# Altium PCB distribution amp (seeed).pcbdoc
Units mil, origin at the board's own origin, x right, y up, seen from the top; angles counter-clockwise.
Board outline 3937.01 x 3937.01 mil, 2 copper layers (Top Layer, Bottom Layer); 136 components, 129 nets, 598 pads, 101 vias.
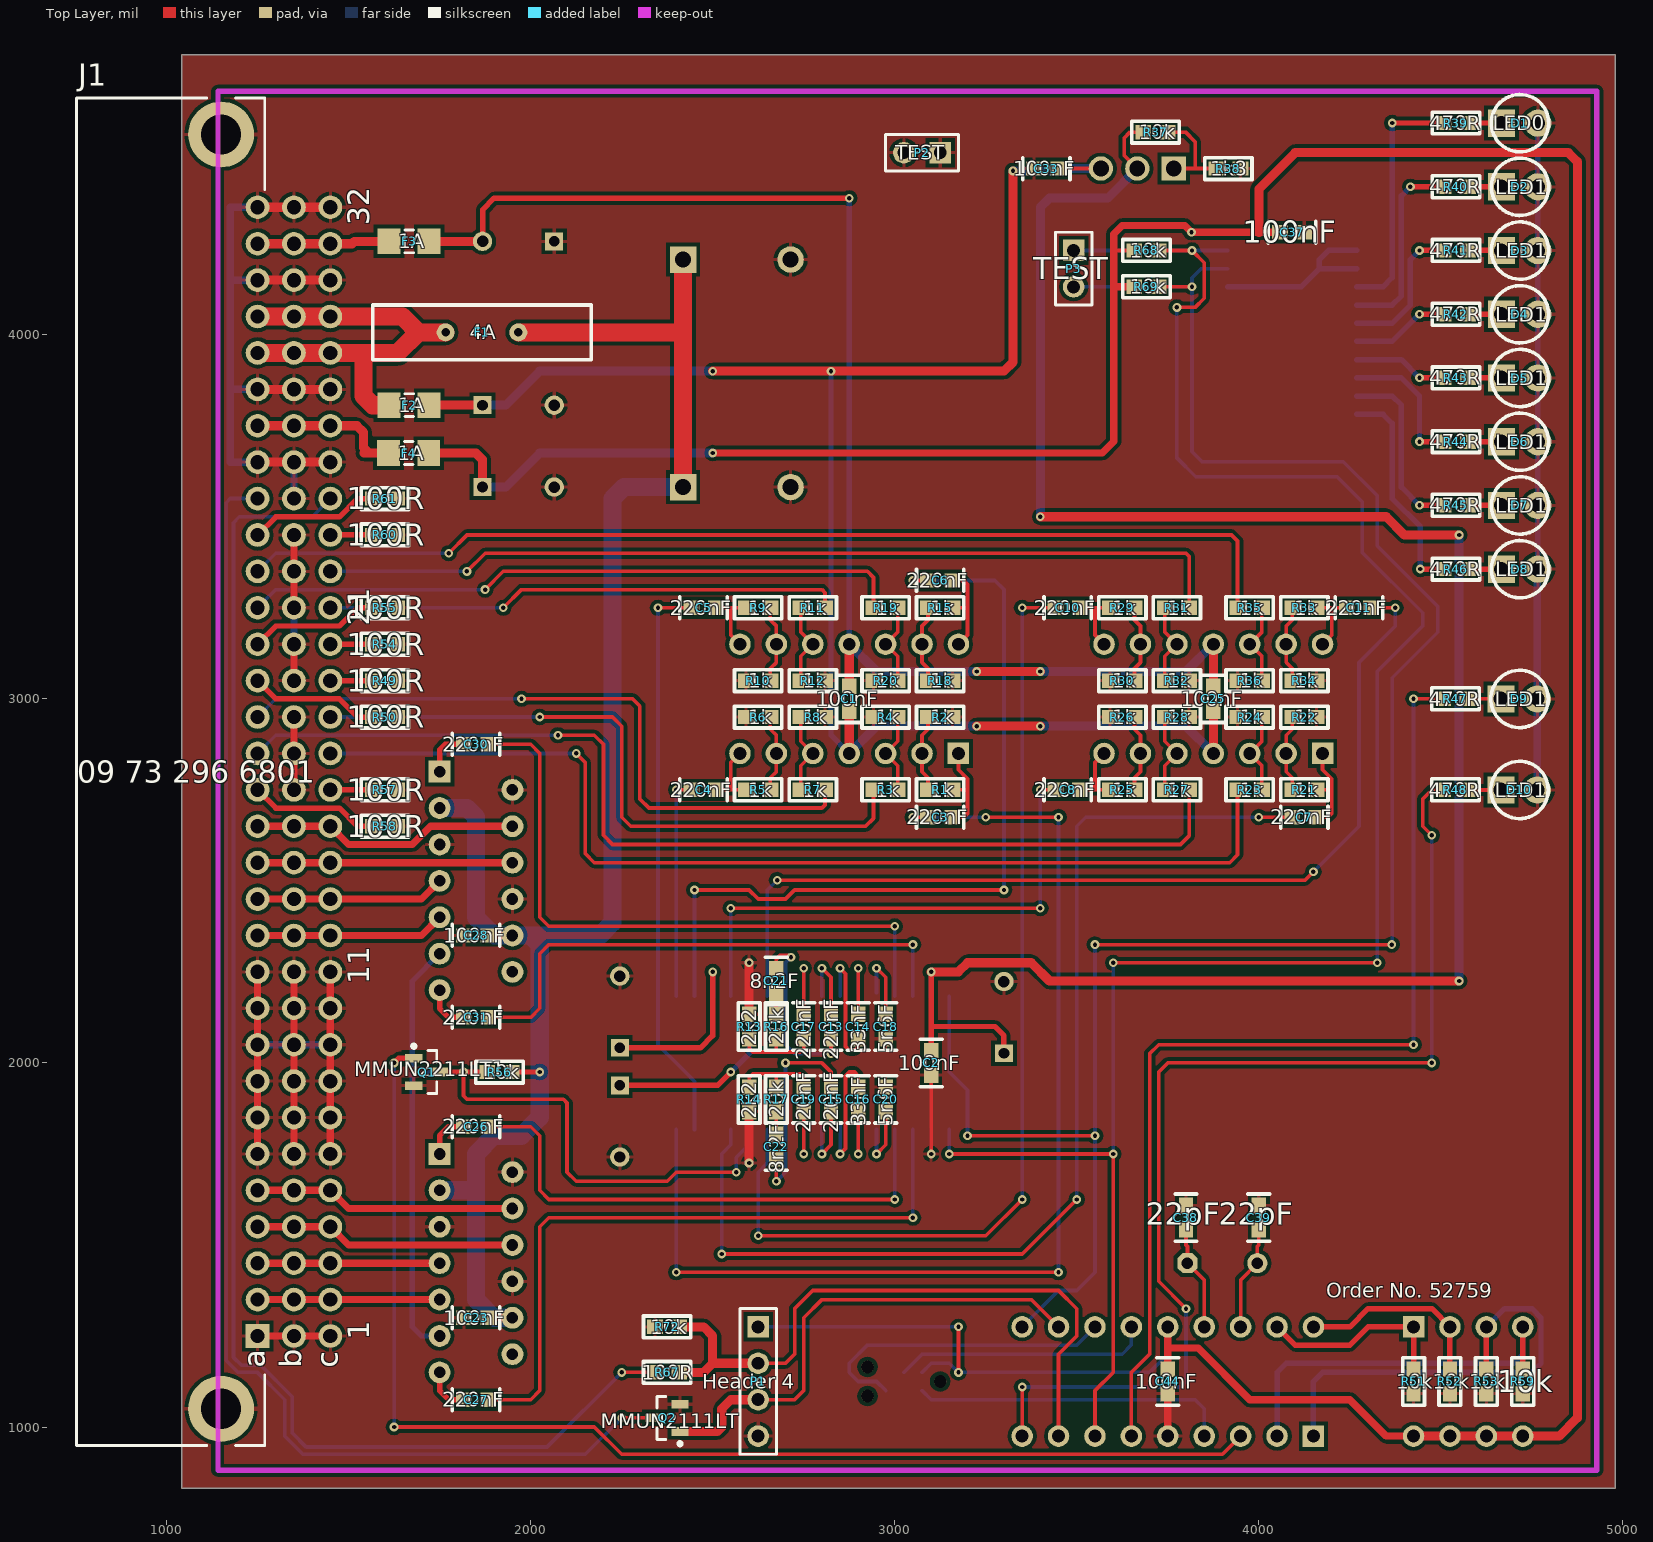
[diagram p0: Top Layer view]
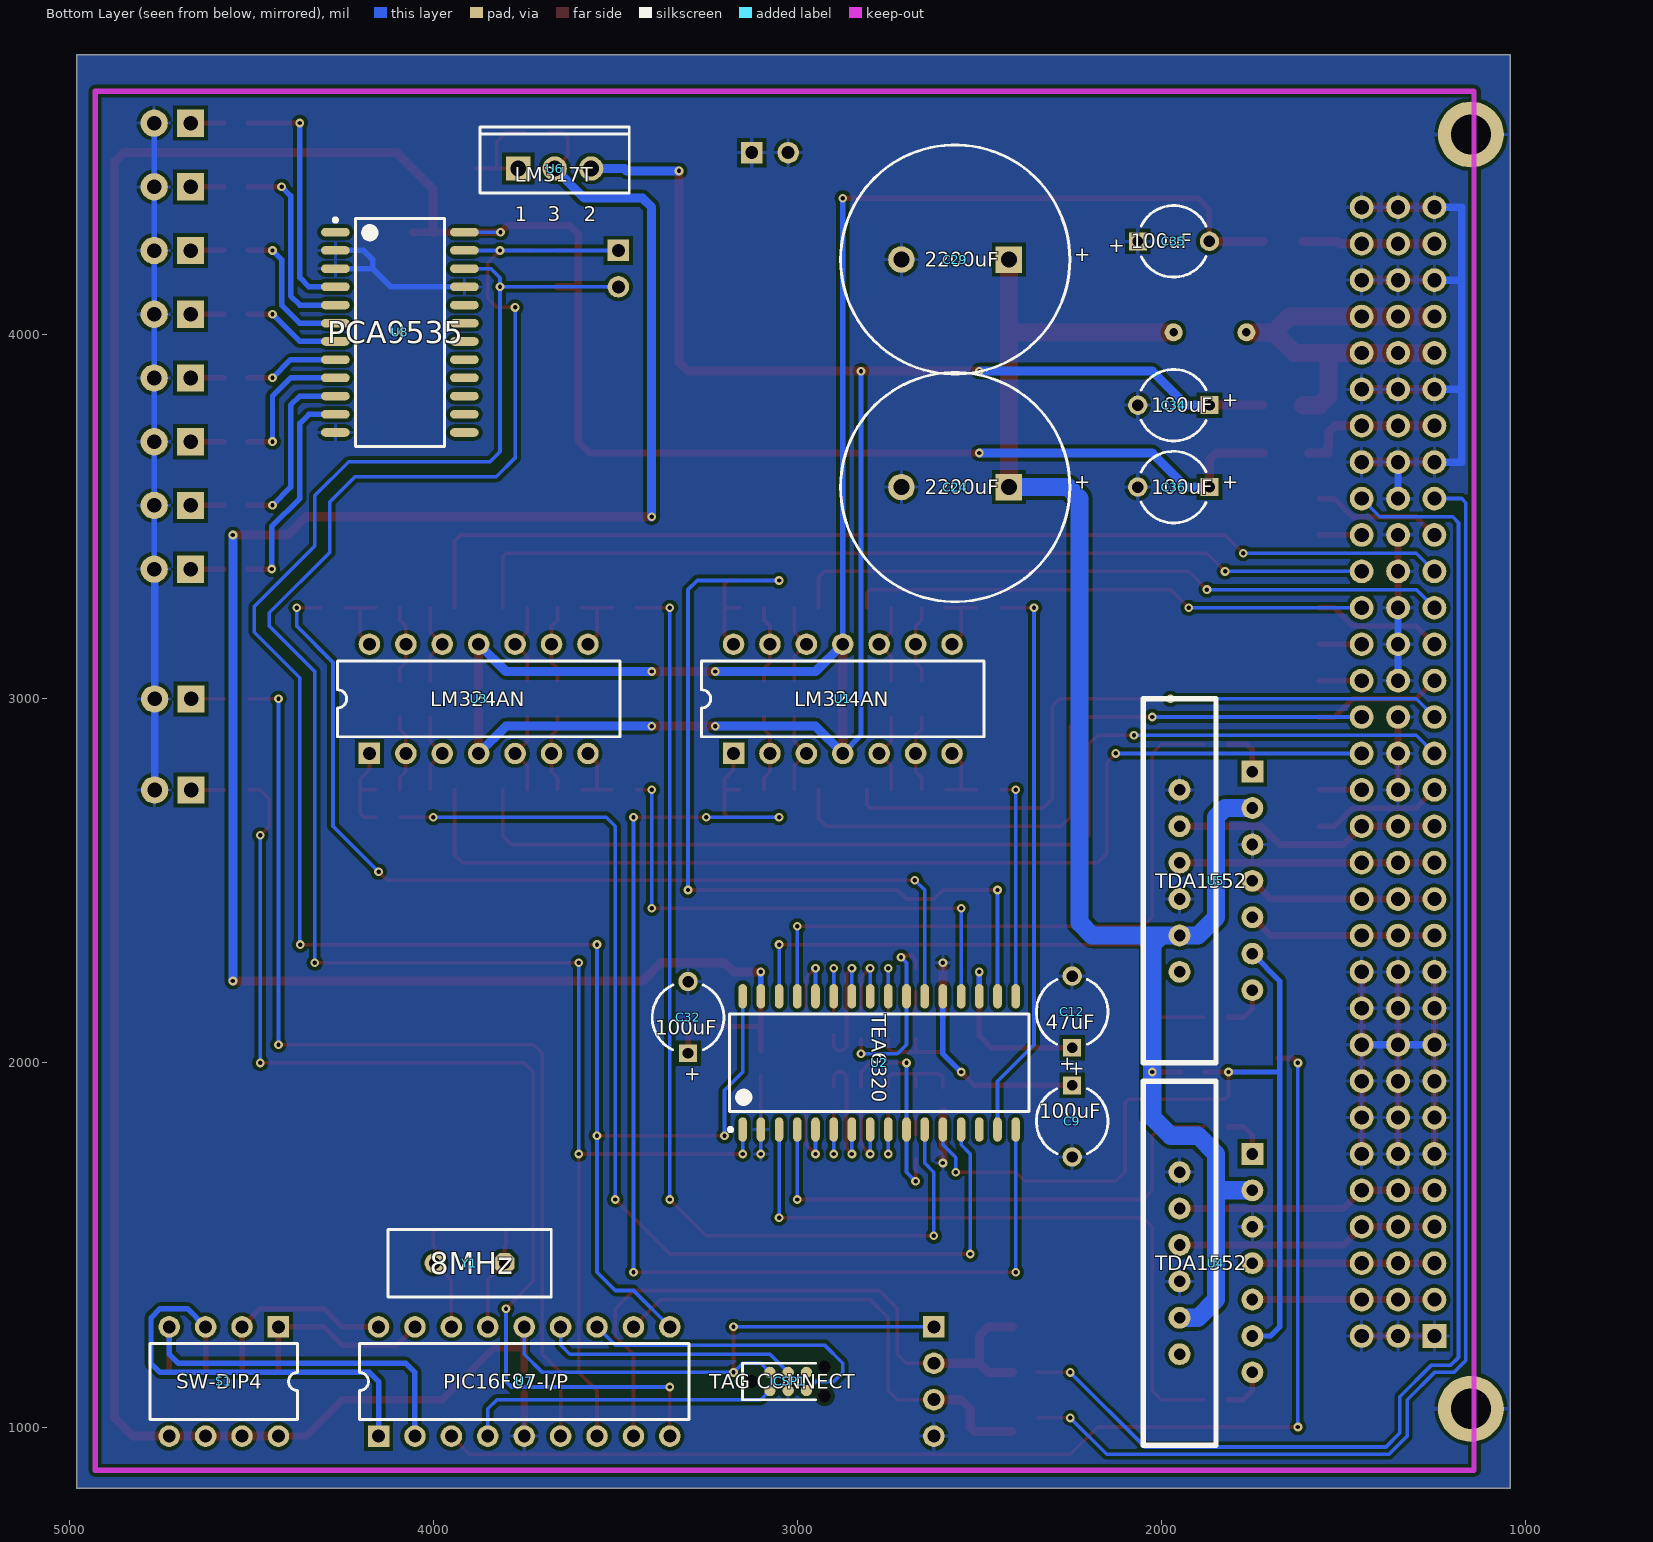
[diagram p1: Bottom Layer view, seen from below]

## Layer stack, top to bottom
Top Layer: signal copper 1.4
Dielectric: dielectric 12.6, FR-4, Dk 4.8
Bottom Layer: signal copper 1.4

## Board outline
1041.34,831.5 1041.34,4768.5 4978.35,4768.5 4978.35,831.5

## Design rules (kind name [scope] priority, off if disabled: settings)
Clearance [All] p1: gap=10
FabricationTestPointUsage TestPointUsage [All] p1: valid=0 allowmultiple=FALSE
FabricationTestpoint Testpoint [All] p1: side=3 testpointundercomponent=TRUE minsize=40 maxsize=100 preferedsize=60 minholesize=0 maxholesize=40 preferedholesize=32 testpointgrid=1 allowsidetop=TRUE allowsidebottom=TRUE usegrid=TRUE gridtolerance=0.01
PolygonConnect [All] p1: connectstyle=Relief reliefconductorwidth=10 reliefentries=4 polygonreliefangle="90 Angle"
RoutingVias [All] p1: holewidth=12 width=24 viastyle="Through Hole" minholewidth=12 minwidth=24 maxholewidth=28 maxwidth=50
SilkscreenOverComponentPads [All] p1: minsilkscreentomaskgap=10
SolderMaskExpansion [All] p1: expansion=4
Width "Schematic Width Constraint_9" [InNet('LEFT_1-')] p1: maxlimit=250 minlimit=15 preferedwidth=25 bottomlayer_minwidth=25 minimp=50.000000 maximp=50.000000 favimp=50.000000
Width "Schematic Width Constraint_8" [InNet('RIGHT_1-')] p2: maxlimit=250 minlimit=15 preferedwidth=25 bottomlayer_minwidth=25 minimp=50.000000 maximp=50.000000 favimp=50.000000
Width "Schematic Width Constraint_7" [InNet('RIGHT_1+')] p3: maxlimit=250 minlimit=15 preferedwidth=25 bottomlayer_minwidth=25 minimp=50.000000 maximp=50.000000 favimp=50.000000
Width "Schematic Width Constraint_6" [InNet('RIGHT_2+')] p4: maxlimit=250 minlimit=15 preferedwidth=25 bottomlayer_minwidth=25 minimp=50.000000 maximp=50.000000 favimp=50.000000
Width "Schematic Width Constraint_5" [InNet('RIGHT_2-')] p5: maxlimit=250 minlimit=15 preferedwidth=25 bottomlayer_minwidth=25 minimp=50.000000 maximp=50.000000 favimp=50.000000
Width "Schematic Width Constraint_4" [InNet('LEFT_2-')] p6: maxlimit=250 minlimit=15 preferedwidth=25 bottomlayer_minwidth=25 minimp=50.000000 maximp=50.000000 favimp=50.000000
Width "Schematic Width Constraint_3" [InNet('LEFT_2+')] p7: maxlimit=250 minlimit=15 preferedwidth=25 bottomlayer_minwidth=25 minimp=50.000000 maximp=50.000000 favimp=50.000000
Width "Schematic Width Constraint_2" [InNet('LEFT_1+')] p8: maxlimit=250 minlimit=15 preferedwidth=25 bottomlayer_minwidth=25 minimp=50.000000 maximp=50.000000 favimp=50.000000
Width "Schematic Width Constraint" [InNet('+12VHP')] p9: maxlimit=250 minlimit=15 preferedwidth=50 minimp=50.000000 maximp=50.000000 favimp=50.000000
Width "Schematic Width Constraint_1" [InNet('+12V IN')] p10: maxlimit=250 minlimit=50 preferedwidth=50
Width [All] p11: maxlimit=100 minlimit=10 preferedwidth=15
25 further rules are at their usual default settings.

## Classes and differential pairs
component class U_DIGITAL: C37 C38 C39 C44 D1 D2 D3 D4 D5 D6 D7 D8 D9 D10 ICSP1 P1 P2 P3 Q1 Q2 R39 R40 R41 R42 R43 R44 R45 R46 R47 R48 R51 R52 R53 R56 R59 R67 R68 R69 R72 S1 U7 U8 Y1
component class "U_DC POWER": C32 C33 C34 C35 C36 F1 F2 F3 F4 R37 R38 U6
component class U_AUDIO: C1 C2 C3 C4 C5 C6 C7 C8 C9 C10 C11 C12 C13 C14 C15 C16 C17 C18 C19 C20 C21 C22 C23 C24 C25 C26 C27 C28 C29 C30 C31 R1 R2 R3 R4 R5 R6 R7 R8 R9 R10 R11 R12 R13 R14 R15 R16 R17 R18 R19 R20 R21 R22 R23 R24 R25 R26 R27 R28 R29 R30 R31 R32 R33 R34 R35 R36 R49 R50 R54 R55 R57 R58 R60 R61 U1 U2 U3 U4 U5
component class "Distribution Amp": J1

## Components (designator, comment, footprint, x,y, rotation, side; value= is the part's Value field where it differs from the comment)
C1 "100nF" "CAP (3D) - 0603" 2875,3000 r270 top
C2 "100nF" "CAP (3D) - 0603" 3100,2000 r90 top
C3 "220nF" "CAP (3D) - 0603" 3125,2675 r0 top
C4 "220nF" "CAP (3D) - 0603" 2475,2750 r0 top
C5 "220nF" "CAP (3D) - 0603" 2475,3250 r0 top
C6 "220nF" "CAP (3D) - 0603" 3125,3325 r0 top
C7 "220nF" "CAP (3D) - 0603" 4125,2675 r0 top
C8 "220nF" "CAP (3D) - 0603" 3475,2750 r0 top
C9 "100uF" CAPPR5-5x5 2245,1840 r270 bottom
C10 "220nF" "CAP (3D) - 0603" 3475,3250 r0 top
C11 "220nF" "CAP (3D) - 0603" 4275,3250 r180 top
C12 "47uF" CAPPR5-5x5 2245,2140 r90 bottom
C13 "220nF" "CAP (3D) - 0603" 2825,2100 r270 top
C14 "33nF" "CAP (3D) - 0603" 2900,2100 r270 top
C15 "220nF" "CAP (3D) - 0603" 2825,1900 r90 top
C16 "33nF" "CAP (3D) - 0603" 2900,1900 r90 top
C17 "220nF" "CAP (3D) - 0603" 2750,2100 r90 top
C18 "5n6F" "CAP (3D) - 0603" 2975,2100 r90 top
C19 "220nF" "CAP (3D) - 0603" 2750,1900 r270 top
C20 "5n6F" "CAP (3D) - 0603" 2975,1900 r270 top
C21 "8n2F" "CAP (3D) - 0603" 2675,2225 r90 top
C22 "8n2F" "CAP (3D) - 0603" 2675,1770 r270 top
C23 "100nF" "CAP (3D) - 0603" 1850,1300 r180 top
C24 "2200uF" CAPPR7.5-16x35 2566.34,3581.5 r0 bottom
C25 "100nF" "CAP (3D) - 0603" 3875,3000 r270 top
C26 "220nF" "CAP (3D) - 0603" 1850,1825 r0 top
C27 "220nF" "CAP (3D) - 0603" 1850,1075 r0 top
C28 "100nF" "CAP (3D) - 0603" 1850,2350 r180 top
C29 "2200uF" CAPPR7.5-16x35 2566.34,4206.5 r0 bottom
C30 "220nF" "CAP (3D) - 0603" 1850,2875 r0 top
C31 "220nF" "CAP (3D) - 0603" 1850,2125 r0 top
C32 "100uF" CAPPR5-5x5 3300,2125 r90 bottom
C33 "100nF" "CAP (3D) - 0603" 3416.34,4456.5 r180 top
C34 "100uF" CAPPR5-5x5 1966.34,3806.5 r0 bottom
C35 "100uF" CAPPR5-5x5 1966.34,4256.5 r180 bottom
C36 "100uF" CAPPR5-5x5 1966.34,3581.5 r0 bottom
C37 "100nF" "CAP (3D) - 0603" 4091.34,4281.5 r0 top
C38 "22pF" "CAP (3D) - 0603" 3800,1575 r90 top
C39 "22pF" "CAP (3D) - 0603" 4000,1575 r90 top
C44 "100nF" "CAP (3D) - 0603" 3750,1125 r270 top
D1 "LED0" "LED 3MM" 4666.34,4581.5 r0 top
D2 "LED1" "LED 3MM" 4666.34,4406.5 r0 top
D3 "LED1" "LED 3MM" 4666.34,4231.5 r0 top
D4 "LED1" "LED 3MM" 4666.34,4056.5 r0 top
D5 "LED1" "LED 3MM" 4666.34,3881.5 r0 top
D6 "LED1" "LED 3MM" 4666.34,3706.5 r0 top
D7 "LED1" "LED 3MM" 4666.34,3531.5 r0 top
D8 "LED1" "LED 3MM" 4666.34,3356.5 r0 top
D9 "LED1" "LED 3MM" 4665,3000 r0 top
D10 "LED1" "LED 3MM" 4665,2750 r0 top
F1 "4A" POLYSWITCH 1866.34,4006.5 r0 top
F2 "1A" 3216[1206] 1666.34,3806.5 r0 top
F3 "1A" 3216[1206] 1666.34,4256.5 r0 top
F4 "1A" 3216[1206] 1665,3675 r0 top
ICSP1 "TAG CONNECT" "ICSP - TAG CONNECT TYPE2" 3125,1125 r180 bottom
J1 "09 73 296 6801" 0973296X801 752.36,2800 r90 top
P1 "Header 4" HDR1X4 2625,1275 r270 top
P2 "TEST" HDR1X2 3125,4500 r180 top
P3 "TEST" HDR1X2 3491.34,4231.5 r270 top
Q1 "MMUN2211LT1" SOT23-3L 1714.57,1975 r0 top
Q2 "MMUN2111LT" SOT23-3L 2375,1025 r180 top
R1 "1k" "RES (3D) - 0603" 3125,2750 r180 top
R2 "1k" "RES (3D) - 0603" 3125,2950 r0 top
R3 "1k" "RES (3D) - 0603" 2975,2750 r180 top
R4 "1k" "RES (3D) - 0603" 2975,2950 r180 top
R5 "1k" "RES (3D) - 0603" 2625,2750 r0 top
R6 "1k" "RES (3D) - 0603" 2625,2950 r180 top
R7 "1k" "RES (3D) - 0603" 2775,2750 r0 top
R8 "1k" "RES (3D) - 0603" 2775,2950 r0 top
R9 "1k" "RES (3D) - 0603" 2625,3250 r0 top
R10 "1k" "RES (3D) - 0603" 2625,3050 r180 top
R11 "1k" "RES (3D) - 0603" 2775,3250 r0 top
R12 "1k" "RES (3D) - 0603" 2775,3050 r0 top
R13 "2k2" "RES (3D) - 0603" 2600,2100 r270 top
R14 "2k2" "RES (3D) - 0603" 2600,1900 r90 top
R15 "1k" "RES (3D) - 0603" 3125,3250 r180 top
R16 "20k" "RES (3D) - 0603" 2675,2100 r270 top
R17 "20k" "RES (3D) - 0603" 2675,1900 r90 top
R18 "1k" "RES (3D) - 0603" 3125,3050 r0 top
R19 "1k" "RES (3D) - 0603" 2975,3250 r180 top
R20 "1k" "RES (3D) - 0603" 2975,3050 r180 top
R21 "1k" "RES (3D) - 0603" 4125,2750 r180 top
R22 "1k" "RES (3D) - 0603" 4125,2950 r0 top
R23 "1k" "RES (3D) - 0603" 3975,2750 r180 top
R24 "1k" "RES (3D) - 0603" 3975,2950 r180 top
R25 "1k" "RES (3D) - 0603" 3625,2750 r0 top
R26 "1k" "RES (3D) - 0603" 3625,2950 r180 top
R27 "1k" "RES (3D) - 0603" 3775,2750 r0 top
R28 "1k" "RES (3D) - 0603" 3775,2950 r0 top
R29 "1k" "RES (3D) - 0603" 3625,3250 r0 top
R30 "1k" "RES (3D) - 0603" 3625,3050 r180 top
R31 "1k" "RES (3D) - 0603" 3775,3250 r0 top
R32 "1k" "RES (3D) - 0603" 3775,3050 r0 top
R33 "1k" "RES (3D) - 0603" 4125,3250 r180 top
R34 "1k" "RES (3D) - 0603" 4125,3050 r0 top
R35 "1k" "RES (3D) - 0603" 3975,3250 r180 top
R36 "1k" "RES (3D) - 0603" 3975,3050 r180 top
R37 "10k" "RES (3D) - 0603" 3716.34,4556.5 r0 top
R38 "1k8" "RES (3D) - 0603" 3916.34,4456.5 r0 top
R39 "470R" "RES (3D) - 0603" 4541.34,4581.5 r180 top
R40 "470R" "RES (3D) - 0603" 4541.34,4406.5 r180 top
R41 "470R" "RES (3D) - 0603" 4541.34,4231.5 r180 top
R42 "470R" "RES (3D) - 0603" 4541.34,4056.5 r180 top
R43 "470R" "RES (3D) - 0603" 4541.34,3881.5 r180 top
R44 "470R" "RES (3D) - 0603" 4541.34,3706.5 r180 top
R45 "470R" "RES (3D) - 0603" 4541.34,3531.5 r180 top
R46 "470R" "RES (3D) - 0603" 4541.34,3356.5 r180 top
R47 "470R" "RES (3D) - 0603" 4540,3000 r180 top
R48 "470R" "RES (3D) - 0603" 4540,2750 r180 top
R49 "100R" "RES (3D) - 0603" 1600,3050 r180 top
R50 "100R" "RES (3D) - 0603" 1600,2950 r180 top
R51 "10k" "RES (3D) - 0603" 4425,1125 r270 top
R52 "10k" "RES (3D) - 0603" 4525,1125 r270 top
R53 "10k" "RES (3D) - 0603" 4625,1125 r270 top
R54 "100R" "RES (3D) - 0603" 1600,3150 r180 top
R55 "100R" "RES (3D) - 0603" 1600,3250 r180 top
R56 "10k" "RES (3D) - 0603" 1914.57,1975 r0 top
R57 "100R" "RES (3D) - 0603" 1600,2750 r180 top
R58 "100R" "RES (3D) - 0603" 1600,2650 r180 top
R59 "10k" "RES (3D) - 0603" 4725,1125 r270 top
R60 "100R" "RES (3D) - 0603" 1600,3450 r180 top
R61 "100R" "RES (3D) - 0603" 1600,3550 r180 top
R67 "100R" "RES (3D) - 0603" 2375,1150 r0 top
R68 "10k" "RES (3D) - 0603" 3691.34,4231.5 r180 top
R69 "10k" "RES (3D) - 0603" 3691.34,4131.5 r180 top
R72 "10k" "RES (3D) - 0603" 2375,1275 r180 top
S1 "SW-DIP4" DIP-8 4575,1125 r0 bottom
U1 "LM324AN" N014 2875,3000 r180 bottom
U2 "TEA6320" SOIC127P1047-32L 2775,2000 r90 bottom
U3 "LM324AN" N014 3875,3000 r180 bottom
U4 "TDA1552" DBS13P 1750,1750 r270 bottom
U5 "TDA1552" DBS13P 1750,2800 r270 bottom
U6 "LM317T" TO220ABN 3666.34,4456.5 r180 bottom
U7 "PIC16F87-I/P" PDIP300-18 3750,1125 r180 bottom
U8 "PCA9535" WSO24_L 4091.34,4006.5 r180 bottom
Y1 "8MHz" HC-49U 3900,1450 r0 bottom

## Footprints (in the part's own frame and the unit in brackets; to place one, negate y for a bottom-side part, rotate by r counter-clockwise, add the part's x,y. Pads: shape width x height; smd on the part's side, far side on the other; paste and mask are expansions set on the pad)
3216[1206] [mm] "Chip Resistor; Body 3.2 x 1.6 mm (LxW typ)"
  rect 1.6x1.8 smd: 1(-1.4,0) 2(1.4,0)
  silkscreen extent -0.3,-0.8 0.3,0.8
0973296X801 [mm] "Connector; DIN 41612, Type R, Thru-Hole; Rows a+b+c, 96 Position; Right Angle"
  round 4.6 hole 2.8: 33(-44.45,-10.1) 34(44.45,-10.1)
  rect 1.65x1.65 hole 1: A1(-39.37,-12.64)
  round 1.65 hole 1: A2(-36.83,-12.64) A3(-34.29,-12.64) A4(-31.75,-12.64) A5(-29.21,-12.64) A6(-26.67,-12.64) A7(-24.13,-12.64) A8(-21.59,-12.64) A9(-19.05,-12.64) A10(-16.51,-12.64) A11(-13.97,-12.64) A12(-11.43,-12.64) A13(-8.89,-12.64) A14(-6.35,-12.64) A15(-3.81,-12.64) A16(-1.27,-12.64) A17(1.27,-12.64) A18(3.81,-12.64) A19(6.35,-12.64) A20(8.89,-12.64) A21(11.43,-12.64) A22(13.97,-12.64) A23(16.51,-12.64) A24(19.05,-12.64) A25(21.59,-12.64) A26(24.13,-12.64) A27(26.67,-12.64) A28(29.21,-12.64) A29(31.75,-12.64) A30(34.29,-12.64) A31(36.83,-12.64) A32(39.37,-12.64) B1(-39.37,-15.18) B2(-36.83,-15.18) B3(-34.29,-15.18) B4(-31.75,-15.18) B5(-29.21,-15.18) B6(-26.67,-15.18) B7(-24.13,-15.18) B8(-21.59,-15.18) B9(-19.05,-15.18) B10(-16.51,-15.18) B11(-13.97,-15.18) B12(-11.43,-15.18) B13(-8.89,-15.18) B14(-6.35,-15.18) B15(-3.81,-15.18) B16(-1.27,-15.18) B17(1.27,-15.18) B18(3.81,-15.18) B19(6.35,-15.18) B20(8.89,-15.18) B21(11.43,-15.18) B22(13.97,-15.18) B23(16.51,-15.18) B24(19.05,-15.18) B25(21.59,-15.18) B26(24.13,-15.18) B27(26.67,-15.18) B28(29.21,-15.18) B29(31.75,-15.18) B30(34.29,-15.18) B31(36.83,-15.18) B32(39.37,-15.18) C1(-39.37,-17.72) C2(-36.83,-17.72) C3(-34.29,-17.72) C4(-31.75,-17.72) C5(-29.21,-17.72) C6(-26.67,-17.72) C7(-24.13,-17.72) C8(-21.59,-17.72) C9(-19.05,-17.72) C10(-16.51,-17.72) C11(-13.97,-17.72) C12(-11.43,-17.72) C13(-8.89,-17.72) C14(-6.35,-17.72) C15(-3.81,-17.72) C16(-1.27,-17.72) C17(1.27,-17.72) C18(3.81,-17.72) C19(6.35,-17.72) C20(8.89,-17.72) C21(11.43,-17.72) C22(13.97,-17.72) C23(16.51,-17.72) C24(19.05,-17.72) C25(21.59,-17.72) C26(24.13,-17.72) C27(26.67,-17.72) C28(29.21,-17.72) C29(31.75,-17.72) C30(34.29,-17.72) C31(36.83,-17.72) C32(39.37,-17.72)
  silkscreen extent -47,-13.14 47,0
"CAP (3D) - 0603" [mm]
  rect 1.1x1 smd: 1(0.85,0) 2(-0.85,0)
  silkscreen extent -1.65,-0.76 1.65,0.76, body extent -0.8,-0.4 0.8,0.4, height 0.92
CAPPR5-5x5 [mm] "Capacitor, Electrolytic, Radial; Body 5 x 5 mm (Dia.xH typ); Pin Spacing 5 mm (typ)"
  rect 1.25x1.25 hole 0.75: 1(-2.5,0)
  round 1.35 hole 0.8: 2(2.5,0)
  silkscreen extent -2.26,-2.5 2.27,2.5
CAPPR7.5-16x35 [mm] "Capacitor, Electrolytic, Radial; Body 16 x 35 mm (Dia.xH typ); Pin Spacing 7.5 mm (typ)"
  rect 1.85x1.85 hole 1.1: 1(-3.75,0)
  round 1.85 hole 1.1: 2(3.75,0)
  silkscreen extent -8,-8 8,8
DBS13P [mil] "DBS13P"
  rect 60x60 hole 32: 1(0,0)
  round 60 hole 32: 2(50,-200) 3(100,0) 4(150,-200) 5(200,0) 6(250,-200) 7(300,0) 8(350,-200) 9(400,0) 10(450,-200) 11(500,0) 12(550,-200) 13(600,0)
  silkscreen extent -200,-300 800,-100
DIP-8 [mm] "DIP; 8 Leads; Row Spacing 7.62 mm; Pitch 2.54 mm"
  rect 1.5x1.5 hole 0.9: 1(-3.81,-3.81)
  round 1.5 hole 0.9: 2(-1.27,-3.81) 3(1.27,-3.81) 4(3.81,-3.81) 5(3.81,3.81) 6(1.27,3.81) 7(-1.27,3.81) 8(-3.81,3.81)
  silkscreen extent -5.15,-2.65 5.15,2.65
HC-49U [mm] "Quartz Crystal, Thru-Hole; 2 Leads; Body 11.35 x 4.65 x 13.46 mm (LxWxH max)"
  oct 1.4x1.4 hole 0.8: 1(-2.44,0)
  round 1.4 hole 0.8: 2(2.44,0)
  silkscreen extent -5.7,-2.35 5.7,2.35
HDR1X2 [mm] "Connector; Header; 2 Position"
  rect 1.5x1.5 hole 0.9: 1(0,0)
  round 1.5 hole 0.9: 2(2.54,0)
  silkscreen extent -1.27,-1.27 3.81,1.27
HDR1X4 [mm] "Connector; Header; 4 Position"
  rect 1.5x1.5 hole 0.9: 1(0,0)
  round 1.5 hole 0.9: 2(2.54,0) 3(5.08,0) 4(7.62,0)
  silkscreen extent -1.27,-1.27 8.89,1.27
"ICSP - TAG CONNECT TYPE2" [mil] "ICSP - TAG CONNECT - TYPE 2"
  round 31 smd paste-40: 1(50,-25) 2(50,25) 3(100,-25) 4(100,25) 5(150,-25) 6(150,25)
  round 34 hole 35 unplated: A(0,0) B(200,40) C(200,-40)
  silkscreen extent -25,-50 175,50
"LED 3MM" [mil]
  rect 75x75 hole 40: 1(0,-0.37)
  round 75 hole 40: 2(100,-0.37)
  silkscreen extent -28,-79 130,78
N014 [mm] "DIP; 14 Leads; Row Spacing 7.62 mm; Pitch 2.54 mm"
  rect 1.5x1.5 hole 0.9: 1(-7.62,-3.81)
  round 1.5 hole 0.9: 2(-5.08,-3.81) 3(-2.54,-3.81) 4(0,-3.81) 5(2.54,-3.81) 6(5.08,-3.81) 7(7.62,-3.81) 8(7.62,3.81) 9(5.08,3.81) 10(2.54,3.81) 11(0,3.81) 12(-2.54,3.81) 13(-5.08,3.81) 14(-7.62,3.81)
  silkscreen extent -9.85,-2.65 9.85,2.65
PDIP300-18 [mm] "DIP, Plastic; 18 Leads; Row Spacing 7.62 mm; Pitch 2.54 mm"
  rect 1.5x1.5 hole 0.9: 1(-10.16,-3.81)
  round 1.5 hole 0.9: 2(-7.62,-3.81) 3(-5.08,-3.81) 4(-2.54,-3.81) 5(0,-3.81) 6(2.54,-3.81) 7(5.08,-3.81) 8(7.62,-3.81) 9(10.16,-3.81) 10(10.16,3.81) 11(7.62,3.81) 12(5.08,3.81) 13(2.54,3.81) 14(0,3.81) 15(-2.54,3.81) 16(-5.08,3.81) 17(-7.62,3.81) 18(-10.16,3.81)
  silkscreen extent -11.5,-2.65 11.5,2.65
POLYSWITCH [mm] "Element 14 RUEF400 (4A)"
  round 1.25 hole 0.6: 1(-2.54,0) 2(2.54,0)
  silkscreen extent -7.62,-1.91 7.62,1.91
"RES (3D) - 0603" [mm]
  rect 1.1x1 smd: 1(0.85,0) 2(-0.85,0)
  silkscreen extent -1.65,-0.76 1.65,0.76, body extent -0.8,-0.4 0.8,0.4, height 0.92
SOIC127P1047-32L [mm] "SOIC, 32-Leads, Body 20.8x7.5mm, Pitch 1.27mm, IPC High Density"
  oval 1.7x0.6 smd: 1(-4.65,9.525) 2(-4.65,8.255) 3(-4.65,6.985) 4(-4.65,5.715) 5(-4.65,4.445) 6(-4.65,3.175) 7(-4.65,1.905) 8(-4.65,0.635) 9(-4.65,-0.635) 10(-4.65,-1.905) 11(-4.65,-3.175) 12(-4.65,-4.445) 13(-4.65,-5.715) 14(-4.65,-6.985) 15(-4.65,-8.255) 16(-4.65,-9.525) 17(4.65,-9.525) 18(4.65,-8.255) 19(4.65,-6.985) 20(4.65,-5.715) 21(4.65,-4.445) 22(4.65,-3.175) 23(4.65,-1.905) 24(4.65,-0.635) 25(4.65,0.635) 26(4.65,1.905) 27(4.65,3.175) 28(4.65,4.445) 29(4.65,5.715) 30(4.65,6.985) 31(4.65,8.255) 32(4.65,9.525)
  silkscreen extent -4.77,-10.45 3.4,10.5, body extent -3.8,-10.47 3.8,10.47, height 2.64
SOT23-3L [mm] "SOT23, 3-Leads, Body 2.9x1.3mm, Pitch 0.95mm, Lead Span 2.5mm, IPC High Density"
  rect 1.2x0.6 smd: 1(-0.9,0.95) 2(-0.9,-0.95) 3(0.9,0)
  silkscreen extent -1.02,-1.5 0.7,1.92, body extent -0.7,-1.5 0.7,1.5, height 1.1
TO220ABN [mm] "TO, Thru-Hole, Vertical, Heatsink Mounted; 3 In-Line Leads; Pitch 2.54 mm; Pin sequence 1, 3, 2"
  rect 1.7x1.7 hole 1.1: 1(-2.54,0)
  round 1.7 hole 1.1: 2(2.54,0) 3(0,0)
  silkscreen extent -5.2,-1.7 5.2,2.9
WSO24_L [mm] "SOIC, 24-Leads, Body 15.4x7.5mm, Pitch 1.27mm, IPC High Density"
  oval 2x0.6 smd: 1(-4.5,6.985) 2(-4.5,5.715) 3(-4.5,4.445) 4(-4.5,3.175) 5(-4.5,1.905) 6(-4.5,0.635) 7(-4.5,-0.635) 8(-4.5,-1.905) 9(-4.5,-3.175) 10(-4.5,-4.445) 11(-4.5,-5.715) 12(-4.5,-6.985) 13(4.5,-6.985) 14(4.5,-5.715) 15(4.5,-4.445) 16(4.5,-3.175) 17(4.5,-1.905) 18(4.5,-0.635) 19(4.5,0.635) 20(4.5,1.905) 21(4.5,3.175) 22(4.5,4.445) 23(4.5,5.715) 24(4.5,6.985)
  silkscreen extent -4.62,-7.95 3.1,7.96, body extent -3.8,-7.8 3.8,7.8, height 2.65

## Part data
C1 C2 C3 C4 C5 C6 C7 C8 C10 C11 C13 C14 C15 C16 C17 C18 C19 C20 C21 C22 C23 C25 C26 C27 C28 C30 C31 C33 C37 C38 C39 C44: library part Cap, "Capacitor"
C9 C12 C24 C29 C32 C34 C35 C36: library part "Cap Pol1", "Polarized Capacitor (Radial)"
D1: "Typical INFRARED GaAs LED"
D2 D3 D4 D5 D6 D7 D8 D9 D10: "Typical RED GaAs LED"
F1 F2 F3 F4: library part "FUSE ALTRONICS S5985"
ICSP1: library part "ICSP - TAG CONNECT"
J1: "Eurocard DIN 41612, Type R, 96 Position, Rows a+b+c, Performance level 2, Female, Lead 3.0 mm, Pitch 2.54 mm"
P1: "Header, 4-Pin"
P2 P3: library part "Header 2", "Header, 2-Pin"
Q1: library part "NPN DIGITAL TRANSISTOR"
Q2: library part "PNP DIGITAL TRANSISTOR", "MMUN2111LT1"
R1 R2 R3 R4 R5 R6 R7 R8 R9 R10 R11 R12 R13 R14 R15 R16 R17 R18 R19 R20 R21 R22 R23 R24 R25 R26 R27 R28 R29 R30 R31 R32 R33 R34 R35 R36 R37 R38 R39 R40 R41 R42 R43 R44 R45 R46 R47 R48 R49 R50 R51 R52 R53 R54 R55 R56 R57 R58 R59 R60 R61 R67 R68 R69 R72: library part Res2, "Resistor"
S1: "DIP Switch"
U1 U3: "Quadruple Operational Amplifier"
U2: "TEA6320 SOUND FADER CONTROL"
U6: "1.2V to 37V Voltage Regulator"
U7: "Enhanced FLASH Microcontroller with nanoWatt Technology, 4K (x14-Bit words) FLASH, 368 Bytes RAM, 18-Pin PDIP, Standard VDD Range, Industrial Temperature"
U8: "PCA9535 I2C BUS 16 BIT IO EXPANDER"
Y1: library part XTAL, "Crystal Oscillator"

## Free pads (board coordinates)
  round 181.1 hole 110.24: 33(1150,1050) 34(1150,4550)
  rect 64.96x64.96 hole 39.37: A1(1250,1250)
  round 64.96 hole 39.37: A2(1250,1350) A3(1250,1450) A4(1250,1550) A5(1250,1650) A6(1250,1750) A7(1250,1850) A8(1250,1950) A9(1250,2050) A10(1250,2150) A11(1250,2250) A12(1250,2350) A13(1250,2450) A14(1250,2550) A15(1250,2650) A16(1250,2750) A17(1250,2850) A18(1250,2950) A19(1250,3050) A20(1250,3150) A21(1250,3250) A22(1250,3350) A23(1250,3450) A24(1250,3550) A25(1250,3650) A26(1250,3750) A27(1250,3850) A28(1250,3950) A29(1250,4050) A30(1250,4150) A31(1250,4250) A32(1250,4350) B1(1350,1250) B2(1350,1350) B3(1350,1450) B4(1350,1550) B5(1350,1650) B6(1350,1750) B7(1350,1850) B8(1350,1950) B9(1350,2050) B10(1350,2150) B11(1350,2250) B12(1350,2350) B13(1350,2450) B14(1350,2550) B15(1350,2650) B16(1350,2750) B17(1350,2850) B18(1350,2950) B19(1350,3050) B20(1350,3150) B21(1350,3250) B22(1350,3350) B23(1350,3450) B24(1350,3550) B25(1350,3650) B26(1350,3750) B27(1350,3850) B28(1350,3950) B29(1350,4050) B30(1350,4150) B31(1350,4250) B32(1350,4350) C1(1450,1250) C2(1450,1350) C3(1450,1450) C4(1450,1550) C5(1450,1650) C6(1450,1750) C7(1450,1850) C8(1450,1950) C9(1450,2050) C10(1450,2150) C11(1450,2250) C12(1450,2350) C13(1450,2450) C14(1450,2550) C15(1450,2650) C16(1450,2750) C17(1450,2850) C18(1450,2950) C19(1450,3050) C20(1450,3150) C21(1450,3250) C22(1450,3350) C23(1450,3450) C24(1450,3550) C25(1450,3650) C26(1450,3750) C27(1450,3850) C28(1450,3950) C29(1450,4050) C30(1450,4150) C31(1450,4250) C32(1450,4350)

## Via types
v1: diameter 24, hole 12, Top Layer to Bottom Layer, 98 vias
v2: diameter 24, hole 12, Top Layer to Bottom Layer, tented both sides, 3 vias

## Nets (pads, with @x,y where several pads share a name; then routed paths per layer and width w, separated by ;. In a path a pad name is that pad's centre, name@x,y a point inside that pad or via, vN(x,y) a via of type N, cw(c..) or ccw(c..) an arc to the next point about the centre after c; other vN are vias at no path point)
5V: C36.1 C37.2 C44.2 F4.2 ICSP1.2 P1.1 R68.1 R69.1 S1.5 S1.6 S1.7 S1.8 U7.14 U8.24 | length 10590.9
  Top Layer w10: v1(3175,1150) v1(3175,1275) ; 3606.5,4231.5 R68.1
  Top Layer w20: v1(2500,3675) 3570,3675 3601.5,3706.5 3601.5,4131.5 ; R69.1 3601.5,4131.5 ; C44.2 3750,1216.73 ; U7.14 3750,1216.73 ; C37.2 4000,4281.5 v1(3815,4281.5) 3796.5,4300 3625,4300 3601.5,4276.5 3601.5,4131.5 ; S1.8 4350,975 4250,1075 3975,1075 3833.27,1216.73 3750,1216.73
  Top Layer w25: F4.2 1850,3675 1867.91,3657.09 C36.1 ; 4000,4281.5 4000,4400 4100,4500 4850,4500 4875,4475 4875,1025 4825,975 S1.5 S1.6 S1.7 S1.8
  Bottom Layer w10: P1.1 v1(3175,1275) ; ICSP1.2 3100,1175 3150,1175 v1(3175,1150) 3700,1150 3750,1200 U7.14 ; v1(3815,4281.5) U8.24
  Bottom Layer w25: C36.1 1931.5,3581.5 2025,3675 v1(2500,3675)
8V5: C2.1 C32.1 R37.2 U2.31 U6.3 | length 5737.7
  Top Layer w10: U6.3 3630,4492.83 3630,4540 3646.5,4556.5 R37.2
  Top Layer w15: C2.1 3100,2100 ; v1(3100,2250) 3100,2100 ; C32.1 3300,2075 3275,2100 3100,2100
  Top Layer w25: v1(3100,2250) 3175,2250 3200,2275 3375,2275 3425,2225 v1(4550,2225) ; v1(3400,3500) 4350,3500 4400,3450 v1(4550,3450)
  Bottom Layer w15: U2.31 v1(3100,2250)
  Bottom Layer w25: v1(3400,3500) 3400,4350 3425,4375 3584.84,4375 U6.3 ; v1(4550,2225) v1(4550,3450)
"+5V IN": F4.1 J1.A26 J1.B26 J1.C26 pad.A26 pad.B26 pad.C26 | length 415.3
  Top Layer w25: pad.A26 pad.B26 pad.C26 1522.83,3750 1541.34,3731.5 1541.34,3690 1556.34,3675 ; 1542.5,3675 1556.34,3675 ; F4.1@1596.04,3675 1556.34,3675
+12V: C1.1 C25.1 C33.2 C34.1 F2.2 U1.4 U3.4 U6.2 | length 4904.1
  Top Layer w10: C33.2 U6.2
  Top Layer w25: F2.2 C34.1 ; v1(2500,3900) v1(2825,3900) 3300,3900 3325,3925 v1(3325,4450) ; U1.4 C1.1 ; v1(3225,2925) v1(3400,2925) ; U3.4 C25.1
  Bottom Layer w15: v1(2825,3900) 2825,2900 U1.4
  Bottom Layer w25: C34.1 1931.5,3806.5 2025,3900 v1(2500,3900) ; U1.4 2950,2925 v1(3225,2925) ; v1(3325,4450) 3468.5,4450 3475,4456.5 U6.2 ; v1(3400,2925) 3800,2925 U3.4
"+12V IN": F1.1 F2.1 J1.A28 J1.A29 J1.B28 J1.B29 J1.C28 J1.C29 pad.A28 pad.A29 pad.B28 pad.B29 pad.C28 pad.C29 | length 1197.8
  Top Layer w50: pad.A28 pad.B28 pad.C28 1541.34,3950 ; pad.A29 pad.B29 pad.C29 1647.83,4050 1691.34,4006.5 ; F2.1 1566.34,3806.5 1541.34,3831.5 1541.34,3950 ; F1.1 1691.34,4006.5 ; 1541.34,3950 1634.84,3950 1691.34,4006.5
+12VHP: C23.2 C24.1 C28.2 C29.1 F1.2 R56.1 U4.3 U4.10 U5.3 U5.10 | length 4810.2
  Top Layer w15: R56.1 v1(2025,1975)
  Top Layer w20: C23.2 U4.10 ; C28.2 U5.10
  Top Layer w50: F1.2 2416.34,4006.5 ; C24.1 C29.1
  Bottom Layer w50: U4.3 1825,1650 ; U5.3 1825,2700 1850,2675 1850,2400 1900,2350 U5.10 2000,2350 ; U4.10 1900,1300 1850,1350 1850,1750 1900,1800 1975,1800 2025,1850 v1(2025,1975) 2025,2325 ; C24.1 2256.5,3581.5 2225,3550 2225,2385 2190,2350 2050,2350 ; 2000,2350 2025,2325 ; 2000,2350 2050,2350 ; 2025,2325 2050,2350
-12V: C1.2 C25.2 C35.2 F3.2 U1.11 U3.11 | length 3773.5
  Top Layer w15: C35.2 1867.91,4342.91 1900,4375 v1(2875,4375)
  Top Layer w25: F3.2 C35.2 ; C1.2 U1.11 ; v1(3225,3075) v1(3400,3075) ; C25.2 U3.11
  Bottom Layer w15: U1.11 v1(2875,4375)
  Bottom Layer w25: U1.11 2950,3075 v1(3225,3075) ; v1(3400,3075) 3800,3075 U3.11
"-12V IN": F3.1 J1.A31 J1.B31 J1.C31 pad.A31 pad.B31 pad.C31 | length 363.9
  Top Layer w25: pad.A31 pad.B31 pad.C31 1509.84,4250 1516.34,4256.5 F3.1
GND: C2.2 C9.2 C12.2 C18.2 C20.2 C23.1 C24.2 C28.1 C29.2 C32.2 C33.1 C34.2 C35.1 C36.2 C37.1 C38.1 C39.1 C44.1 D1.2 D2.2 D3.2 D4.2 D5.2 D6.2 D7.2 D8.2 D9.2 D10.2 ICSP1.3 J1.33 J1.34 J1.A1 J1.A6 J1.A7 J1.A8 J1.A9 J1.A10 J1.A11 J1.A25 J1.A27 J1.A30 J1.A32 J1.B1 J1.B6 J1.B7 J1.B8 J1.B9 J1.B10 J1.B11 J1.B16 J1.B17 J1.B18 J1.B19 J1.B20 J1.B21 J1.B22 J1.B23 J1.B24 J1.B25 J1.B27 J1.B30 J1.B32 J1.C1 J1.C6 J1.C7 J1.C8 J1.C9 J1.C10 J1.C11 J1.C25 J1.C27 J1.C30 J1.C32 P1.4 P2.1 P2.2 pad.33 pad.34 pad.A1 pad.A6 pad.A7 pad.A8 pad.A9 pad.A10 pad.A11 pad.A25 pad.A27 pad.A30 pad.A32 pad.B1 pad.B6 pad.B7 pad.B8 pad.B9 pad.B10 pad.B11 pad.B16 pad.B17 pad.B18 pad.B19 pad.B20 pad.B21 pad.B22 pad.B23 pad.B24 pad.B25 pad.B27 pad.B30 pad.B32 pad.C1 pad.C6 pad.C7 pad.C8 pad.C9 pad.C10 pad.C11 pad.C25 pad.C27 pad.C30 pad.C32 Q1.2 Q2.2 R2.1 R4.1 R6.1 R8.1 R10.1 R12.1 R13.2 R14.2 R18.1 R20.1 R22.1 R24.1 R26.1 R28.1 R30.1 R32.1 R34.1 R36.1 R38.1 R49.2 R50.2 R51.1 R52.1 R53.1 R54.2 R55.2 R57.2 R58.2 R59.1 R60.2 R61.2 R72.1 U2.2 U4.2 U4.5 U4.8 U5.2 U5.5 U5.8 U7.5 U8.2 U8.3 U8.12 U8.21 | length 7527.7
  Top Layer w10: v1(3100,1750) C2.2
  Top Layer w20: pad.A1 pad.B1 pad.C1 ; pad.A6 pad.A7 pad.A8 pad.A9 pad.A10 pad.A11 ; pad.B6 pad.B7 pad.B8 pad.B9 pad.B10 pad.B11 ; pad.B16 pad.B17 pad.B18 ; pad.B19 pad.B20 ; pad.B21 pad.B22 pad.B23 ; pad.C6 pad.C7 pad.C8 pad.C9 pad.C10 pad.C11 ; U7.5 C44.1
  Top Layer w25: pad.A25 pad.B25 pad.C25 ; pad.A27 pad.B27 pad.C27 ; pad.A30 pad.B30 pad.C30 ; pad.A32 pad.B32 pad.C32 ; v1(2600,1725) R14.2 ; R13.2 v1(2600,2275)
  Bottom Layer w10: v1(3100,1750) U2.2
  Bottom Layer w15: U8.21 4116.34,4131.5 4166.34,4181.5 ; U8.3 4166.34,4181.5 ; U8.2 4191.34,4231.5 4166.34,4206.5 4166.34,4181.5 ; D8.2 D7.2 D6.2 D5.2 D4.2 D3.2 D2.2 D1.2
  Bottom Layer w20: pad.A9 pad.B9 pad.C9 ; pad.A25 1175,3650 1175,3850 ; pad.A27 1175,3850 ; pad.A30 1175,4150 ; pad.A32 1175,4350 1175,4150 ; pad.B19 pad.B20 pad.B21 ; pad.B24 pad.B25 ; D10.2 D9.2 4765,3354.79 D8.2 ; 1175,3850 1175,4150
ICSP_PGCLCK: ICSP1.5 U7.12 | length 862.1
  Bottom Layer w10: ICSP1.5 2950,1125 2900,1125 2875,1150 2875,1175 2925,1225 3500,1225 U7.12
ICSP_PGDATA: ICSP1.4 U7.13 | length 706.1
  Bottom Layer w10: ICSP1.4 3075,1200 3625,1200 3650,1225 U7.13
ICSP_VPP: ICSP1.1 U7.4 | length 870.7
  Bottom Layer w10: ICSP1.1 3100,1075 3825,1075 3850,1050 U7.4
ID_0: R51.2 S1.1 U7.17 | length 533
  Top Layer w15: U7.17 4100,1225 4250,1225 4300,1275 S1.1 R51.2
ID_1: R52.2 S1.2 U7.18 | length 533
  Top Layer w15: U7.18 4250,1275 4300,1325 4475,1325 S1.2 R52.2
ID_2: R53.2 S1.3 U7.1 | length 1218.3
  Top Layer w15: R53.2 S1.3
  Bottom Layer w15: U7.1 4150,1125 4175,1150 4750,1150 4775,1175 4775,1300 4750,1325 4675,1325 S1.3
ID_3: R59.2 S1.4 U7.2 | length 1062.2
  Top Layer w15: R59.2 S1.4
  Bottom Layer w15: U7.2 4050,1150 4075,1175 4700,1175 4725,1200 S1.4
IN_AL: C3.1 R1.2 U1.1 | length 262.6
  Top Layer w10: C3.1 3190,2675 3200,2685 3200,2750 ; R1.2 3200,2750 ; U1.1 3175,2805 3200,2780 3200,2750
IN_AR: C4.1 R5.2 U1.7 | length 193.4
  Top Layer w10: C4.1 2550,2750 ; U1.7 2550,2825 2550,2750 ; R5.2 2550,2750
IN_BL: C5.1 R9.2 U1.8 | length 193.4
  Top Layer w10: C5.1 2550,3250 ; U1.8 2550,3175 2550,3250 ; R9.2 2550,3250
IN_BR: C6.1 R15.2 U1.14 | length 262.6
  Top Layer w10: R15.2 3200,3250 ; C6.1 3190,3325 3200,3315 3200,3250 ; U1.14 3200,3175 3200,3250
IN_CL: C7.1 R21.2 U3.1 | length 262.6
  Top Layer w10: C7.1 4190,2675 4200,2685 4200,2750 ; R21.2 4200,2750 ; U3.1 4175,2805 4200,2780 4200,2750
IN_CR: C8.1 R25.2 U3.7 | length 193.4
  Top Layer w10: C8.1 3550,2750 ; U3.7 3550,2825 3550,2750 ; R25.2 3550,2750
IN_DL: C10.1 R29.2 U3.8 | length 193.4
  Top Layer w10: C10.1 3550,3250 ; U3.8 3550,3175 3550,3250 ; R29.2 3550,3250
IN_DR: C11.1 R33.2 U3.14 | length 193.4
  Top Layer w10: R33.2 4200,3250 ; U3.14 4200,3175 4200,3250 ; C11.1 4200,3250
INL_1: J1.C18 pad.C18 R3.1 | length 1849.6
  Top Layer w10: v1(2025,2950) 2225,2950 2250,2925 2250,2675 2275,2650 2920,2650 2941.54,2671.54 R3.1
  Bottom Layer w10: pad.C18 v1(2025,2950)
INL_1_GND: J1.C19 pad.C19 R49.1 | length 116.5
  Top Layer w15: pad.C19 R49.1
INL_2: J1.C21 pad.C21 R11.1 | length 1424.2
  Top Layer w10: v1(1925,3250) 1975,3300 2800,3300 2808.46,3291.54 R11.1
  Bottom Layer w10: pad.C21 v1(1925,3250)
INL_2_GND: J1.C20 pad.C20 R54.1 | length 116.5
  Top Layer w15: pad.C20 R54.1
INL_3: J1.C17 pad.C17 R23.1 | length 2949.6
  Top Layer w10: v1(2125,2850) 2150,2825 2150,2575 2175,2550 3920,2550 3941.54,2571.54 R23.1
  Bottom Layer w10: pad.C17 v1(2125,2850)
INL_3_GND: J1.C16 pad.C16 R57.1 | length 116.5
  Top Layer w15: pad.C16 R57.1
INL_4: J1.C22 pad.C22 R31.1 | length 2524.2
  Top Layer w10: v1(1825,3350) 1875,3400 3800,3400 3808.46,3391.54 R31.1
  Bottom Layer w10: pad.C22 v1(1825,3350)
INL_4_GND: J1.C23 pad.C23 R60.1 | length 116.5
  Top Layer w15: pad.C23 R60.1
INR_1: J1.A18 pad.A18 R7.1 | length 1897.9
  Top Layer w10: v1(1975,3000) 2280,3000 2300,2980 2300,2725 2325,2700 2800,2700 2808.46,2708.46 R7.1
  Bottom Layer w10: pad.A18 1300,3000 v1(1975,3000)
INR_1_GND: J1.A19 pad.A19 R50.1 | length 358
  Top Layer w15: pad.A19 1300,3000 1475,3000 1525,2950 R50.1
INR_2: J1.A21 pad.A21 R19.1 | length 1823.3
  Top Layer w10: v1(1875,3300) 1925,3350 2925,3350 2941.54,3333.46 R19.1
  Bottom Layer w10: pad.A21 1300,3300 v1(1875,3300)
INR_2_GND: J1.A20 pad.A20 R55.1 | length 358
  Top Layer w15: pad.A20 1300,3200 1475,3200 1525,3250 R55.1
INR_3: J1.A17 pad.A17 R27.1 | length 2986.1
  Top Layer w10: v1(2075,2900) 2175,2900 2200,2875 2200,2625 2225,2600 3785,2600 3808.46,2623.46 R27.1
  Bottom Layer w10: pad.A17 1300,2900 v1(2075,2900)
INR_3_GND: J1.A16 pad.A16 R58.1 | length 358
  Top Layer w15: pad.A16 1300,2700 1475,2700 1525,2650 R58.1
INR_4: J1.A22 pad.A22 R35.1 | length 2923.3
  Top Layer w10: v1(1775,3400) 1825,3450 3925,3450 3941.54,3433.46 R35.1
  Bottom Layer w10: pad.A22 1300,3400 v1(1775,3400)
INR_4_GND: J1.A23 pad.A23 R61.1 | length 358
  Top Layer w15: pad.A23 1300,3500 1475,3500 1525,3550 R61.1
L1_IN: C26.2 U4.1 | length 126.9
  Top Layer w15: U4.1 1750,1800 1775,1825 C26.2
L2_IN: C30.2 U5.1 | length 132.7
  Top Layer w15: U5.1 1750,2860 1765,2875 C30.2
LEFT_1+: J1.A5 J1.B5 J1.C5 pad.A5 pad.B5 pad.C5 U4.4 | length 720.7
  Top Layer w20: pad.A5 pad.B5 pad.C5 1500,1600 U4.4
LEFT_1-: J1.A4 J1.B4 J1.C4 pad.A4 pad.B4 pad.C4 U4.6 | length 720.7
  Top Layer w20: pad.A4 pad.B4 pad.C4 1500,1500 U4.6
LEFT_2+: J1.A15 J1.B15 J1.C15 pad.A15 pad.B15 pad.C15 U5.4 | length 741.4
  Top Layer w20: pad.A15 pad.B15 pad.C15 1500,2600 1675,2600 1725,2650 U5.4
LEFT_2-: J1.A14 J1.B14 J1.C14 pad.A14 pad.B14 pad.C14 U5.6 | length 700
  Top Layer w20: pad.A14 pad.B14 pad.C14 U5.6
MUTE: Q1.3 R56.2 U2.12 U4.11 U5.11 | length 2578.3
  Top Layer w10: v1(1815.55,1975) 1815.55,1909.45 1825,1900 2090,1900 2100,1890 2100,1700 2125,1675 2375,1675 2400,1700 v1(2565,1700)
  Top Layer w15: Q1.3 v1(1815.55,1975) R56.2
  Bottom Layer w10: v1(2565,1700) 2565,1740 2600,1775 U2.12
  Bottom Layer w15: U4.11 1700,1250 1675,1275 1675,1975 ; U5.11 1675,2225 1675,1975 ; v1(1815.55,1975) 1675,1975
MUTE_CTRL: Q1.1 U7.3 | length 3436
  Top Layer w10: v1(1625,1000) 2175,1000 2250,925 3900,925 U7.3
  Top Layer w15: v1(1625,2000) 1637.4,2012.4 Q1.1
  Bottom Layer w10: v1(1625,1000) v1(1625,2000)
NetC3_2: C3.2 U2.16 | length 3133.5
  Top Layer w10: v1(2400,1425) v1(3450,1425) ; v1(3050,2675) C3.2 ; v1(3250,2675) v1(3450,2675)
  Bottom Layer w10: v1(2400,1425) U2.16 ; v1(3050,2675) v1(3250,2675) ; v1(3450,1425) v1(3450,2675)
NetC4_2: C4.2 U2.17 | length 608.5
  Top Layer w10: v1(2400,2750) C4.2
  Bottom Layer w10: U2.17 v1(2400,2750)
NetC5_2: C5.2 U2.15 | length 1566
  Top Layer w10: v1(2350,3250) C5.2
  Bottom Layer w10: v1(2350,3250) 2350,2050 2450,1950 U2.15
NetC6_2: C6.2 U2.18 | length 2289.5
  Top Layer w10: v1(2450,2475) 2600,2475 2625,2450 2700,2450 2725,2475 v1(3300,2475) ; v1(3050,3325) C6.2
  Bottom Layer w10: U2.18 v1(2450,2475) ; v1(3050,3325) 3275,3325 3300,3300 v1(3300,2475)
NetC7_2: C7.2 U2.13 | length 3016.3
  Top Layer w10: v1(2525,1475) 3350,1475 v1(3500,1625) ; v1(4000,2675) C7.2
  Bottom Layer w10: v1(2525,1475) 2525,1750 2550,1775 U2.13 ; v1(3500,1625) 3500,2650 3525,2675 v1(4000,2675)
NetC8_2: C8.2 U2.20 | length 1458.5
  Top Layer w10: v1(2550,2425) v1(3400,2425) ; v1(3400,2750) C8.2
  Bottom Layer w10: U2.20 v1(2550,2425) ; v1(3400,2425) v1(3400,2750)
NetC9_1: C9.1 U2.21 | length 548.9
  Top Layer w15: C9.1 2513.43,1938.43 v2(2550,1975)
  Bottom Layer w15: v2(2550,1975) 2600,2025 U2.21
NetC10_2: C10.2 U2.11 | length 2785.2
  Top Layer w10: v1(2625,1525) 3250,1525 v1(3350,1625) ; v1(3350,3250) C10.2
  Bottom Layer w10: v1(2625,1525) 2625,1700 2650,1725 U2.11 ; v1(3350,1625) v1(3350,3250)
NetC11_2: C11.2 U2.22 | length 2697.4
  Top Layer w10: v1(2677,2502) 4127,2502 v1(4150,2525) ; C11.2 v1(4375,3250)
  Bottom Layer w10: U2.22 2650,2475 v1(2677,2502) ; v1(4150,2525) 4275,2650 4275,3100 4375,3200 v1(4375,3250)
NetC12_1: C12.1 U2.19 | length 510.8
  Top Layer w15: C12.1 2466.57,2041.57 2500,2075 v1(2500,2250)
  Bottom Layer w15: U2.19 v1(2500,2250)
NetC13_1: C13.1 C21.1 U2.23 | length 495.9
  Top Layer w10: C21.1 2675,2285 2685,2295 2710,2295 v1(2715,2290) ; v2(2825,2025) C13.1
  Bottom Layer w10: v1(2715,2290) 2700,2275 U2.23 2700,2050 2725,2025 v2(2825,2025)
NetC13_2: C13.2 U2.25 | length 203.8
  Top Layer w10: v1(2800,2260) 2825,2235 C13.2@2825,2143.46
  Bottom Layer w10: U2.25 v1(2800,2260)
NetC14_1: C14.1 U2.26 | length 373
  Top Layer w10: v1(2850,2260) 2865,2245 2865,2045 2875,2035 2890,2035 2900,2045 C14.1 C14.1@2900,2076.54
  Bottom Layer w10: U2.26 v1(2850,2260)
NetC14_2: C14.2 U2.27 | length 183.5
  Top Layer w10: C14.2@2900,2143.46 v1(2900,2260)
  Bottom Layer w10: U2.27@2900,2193.07 v1(2900,2260)
NetC15_1: C15.1 C22.1 U2.10 | length 573.8
  Top Layer w10: v1(2675,1675) C22.1 ; v2(2700,2000) 2800,2000 2825,1975 C15.1
  Bottom Layer w10: v1(2675,1675) 2700,1700 U2.10 v2(2700,2000)
NetC15_2: C15.2 U2.8 | length 203.8
  Top Layer w10: v1(2800,1750) 2825,1775 C15.2
  Bottom Layer w10: v1(2800,1750) U2.8 U2.8@2800,1826.93
NetC16_1: C16.1 U2.7 | length 373
  Top Layer w10: v1(2850,1750) 2865,1765 2865,1965 2875,1975 2890,1975 2900,1965 C16.1
  Bottom Layer w10: v1(2850,1750) U2.7 U2.7@2850,1826.93
NetC16_2: C16.2 U2.6 | length 183.5
  Top Layer w10: v1(2900,1750) C16.2
  Bottom Layer w10: v1(2900,1750) U2.6
NetC17_1: C17.1 U2.24 | length 193.5
  Top Layer w10: C17.1@2750,2143.46 v1(2750,2260)
  Bottom Layer w10: U2.24 v1(2750,2260)
NetC17_2: C17.2 R13.1 R16.1 | length 247.9
  Top Layer w10: R13.1 2600,2040 2610,2030 2675,2030 ; R16.1 2675,2030 ; C17.2 2750,2040 2740,2030 2675,2030
NetC18_1: C18.1 U2.28 | length 193.8
  Top Layer w10: v1(2950,2260) 2975,2235 C18.1@2975,2143.46
  Bottom Layer w10: U2.28@2950,2193.07 v1(2950,2260)
NetC19_1: C19.1 U2.9 | length 193.5
  Top Layer w10: v1(2750,1750) C19.1
  Bottom Layer w10: v1(2750,1750) U2.9 U2.9@2750,1826.93
NetC19_2: C19.2 R14.1 R17.1 | length 247.9
  Top Layer w10: R14.1 2600,1960 2610,1970 2675,1970 ; R17.1 2675,1970 ; C19.2 2750,1960 2740,1970 2675,1970
NetC20_1: C20.1 U2.5 | length 193.8
  Top Layer w10: v1(2950,1750) 2975,1775 C20.1
  Bottom Layer w10: v1(2950,1750) U2.5
NetC21_2: C21.2 R16.2 | length 63.1
  Top Layer w10: R16.2 C21.2 C21.2@2675,2196.54
NetC22_2: C22.2 R17.2 | length 63.1
  Top Layer w10: C22.2 R17.2
NetD1_1: D1.1 R39.2 | length 91.7
  Top Layer w15: R39.2 4665.97,4581.5 D1.1
NetD2_1: D2.1 R40.2 | length 91.7
  Top Layer w15: R40.2 4665.97,4406.5 D2.1
NetD3_1: D3.1 R41.2 | length 91.7
  Top Layer w15: R41.2 4665.97,4231.5 D3.1
NetD4_1: D4.1 R42.2 | length 91.7
  Top Layer w15: R42.2 4575.17,4056.13 D4.1
NetD5_1: D5.1 R43.2 | length 91.7
  Top Layer w15: R43.2 4665.97,3881.5 D5.1
NetD6_1: D6.1 R44.2 | length 91.7
  Top Layer w15: R44.2 4575.17,3706.13 D6.1
NetD7_1: D7.1 R45.2 | length 91.7
  Top Layer w15: R45.2 4665.97,3531.5 D7.1
NetD8_1: D8.1 R46.2 | length 91.7
  Top Layer w15: R46.2 4575.17,3356.13 D8.1
NetD9_1: D9.1 R47.2 | length 95.7
  Top Layer w10: R47.2 4659.47,3000 D9.1@4665.97,3006.5
  Top Layer w25: D9.1@4665.97,3006.5 D9.1@4666.34,3006.13
NetD10_1: D10.1 R48.2 | length 92.2
  Top Layer w10: R48.2 4573.83,2749.63 D10.1
  Top Layer w25: D10.1@4665.97,2756.5 D10.1@4666.34,2756.13
NetR1_1: R1.1 R2.2 U1.2 | length 213.7
  Top Layer w10: R1.1 3091.54,2783.46 3075,2800 U1.2 3075,2900 3091.54,2916.54 R2.2
NetR3_2: R3.2 R4.2 U1.3 | length 227.7
  Top Layer w10: R3.2 3008.46,2816.54 U1.3 3008.46,2883.46 R4.2
NetR5_1: R5.1 R6.2 U1.6 | length 213.7
  Top Layer w10: R5.1 2658.46,2783.46 2675,2800 U1.6 2675,2900 2658.46,2916.54 R6.2
NetR7_2: R7.2 R8.2 U1.5 | length 227.7
  Top Layer w10: R7.2 2741.54,2816.54 U1.5 2741.54,2883.46 R8.2
NetR9_1: R9.1 R10.2 U1.9 | length 213.7
  Top Layer w10: R10.2 2658.46,3083.46 2675,3100 U1.9 2675,3200 2658.46,3216.54 R9.1
NetR11_2: R11.2 R12.2 U1.10 | length 227.7
  Top Layer w10: R12.2 2741.54,3116.54 U1.10 2741.54,3183.46 R11.2
NetR15_1: R15.1 R18.2 U1.13 | length 213.7
  Top Layer w10: R18.2 3091.54,3083.46 3075,3100 U1.13 3075,3200 3091.54,3216.54 R15.1
NetR19_2: R19.2 R20.2 U1.12 | length 227.7
  Top Layer w10: R20.2 3008.46,3116.54 U1.12 3008.46,3183.46 R19.2
NetR21_1: R21.1 R22.2 U3.2 | length 213.7
  Top Layer w10: R21.1 4091.54,2783.46 4075,2800 U3.2 4075,2900 4091.54,2916.54 R22.2
NetR23_2: R23.2 R24.2 U3.3 | length 227.7
  Top Layer w10: R23.2 4008.46,2816.54 U3.3 4008.46,2883.46 R24.2
NetR25_1: R25.1 R26.2 U3.6 | length 213.7
  Top Layer w10: R25.1 3658.46,2783.46 3675,2800 U3.6 3675,2900 3658.46,2916.54 R26.2
NetR27_2: R27.2 R28.2 U3.5 | length 227.7
  Top Layer w10: R27.2 3741.54,2816.54 U3.5 3741.54,2883.46 R28.2
NetR29_1: R29.1 R30.2 U3.9 | length 213.7
  Top Layer w10: R30.2 3658.46,3083.46 3675,3100 U3.9 3675,3200 3658.46,3216.54 R29.1
NetR31_2: R31.2 R32.2 U3.10 | length 227.7
  Top Layer w10: R32.2 3741.54,3116.54 U3.10 3741.54,3183.46 R31.2
NetR33_1: R33.1 R34.2 U3.13 | length 213.7
  Top Layer w10: R34.2 4091.54,3083.46 4075,3100 U3.13 4075,3200 4091.54,3216.54 R33.1
NetR35_2: R35.2 R36.2 U3.12 | length 227.7
  Top Layer w10: R36.2 4008.46,3116.54 U3.12 4008.46,3183.46 R35.2
NetR37_1: R37.1 R38.2 U6.1 | length 276.2
  Top Layer w10: R37.1 3798.5,4556.5 3825,4530 3825,4456.5 ; U6.1 3825,4456.5 ; R38.2 3825,4456.5
OSC1: C38.2 U7.15 Y1.1 | length 287.2
  Top Layer w10: C38.2 3800,1500 3803.94,1496.06 Y1.1 3850,1403.94 U7.15
OSC2: C39.2 U7.16 Y1.2 | length 287.2
  Top Layer w10: U7.16 3950,1403.94 Y1.2 3996.06,1496.06 4000,1500 C39.2
OUTLF: C26.1 U2.4 | length 1479.2
  Top Layer w10: C26.1 2000,1825 2025,1800 2025,1650 2050,1625 v1(3000,1625)
  Bottom Layer w10: v1(3000,1625) U2.4
OUTLR: C27.1 U2.3 | length 1879.2
  Top Layer w10: C27.1 2000,1075 2025,1100 2025,1550 2050,1575 v1(3050,1575)
  Bottom Layer w10: v1(3050,1575) U2.3
OUTRF: C30.1 U2.29 | length 1779.2
  Top Layer w10: C30.1 2000,2875 2025,2850 2025,2400 2050,2375 v1(3000,2375)
  Bottom Layer w10: U2.29 v1(3000,2375)
OUTRR: C31.1 U2.30 | length 1479.2
  Top Layer w10: C31.1 2000,2125 2025,2150 2025,2300 2050,2325 v1(3050,2325)
  Bottom Layer w10: U2.30 v1(3050,2325)
R1_IN: C27.2 U4.13 | length 126.9
  Top Layer w15: U4.13 1750,1100 1775,1075 C27.2
R2_IN: C31.2 U5.13 | length 126.9
  Top Layer w15: U5.13 1750,2150 1775,2125 C31.2
RIGHT_1+: J1.A3 J1.B3 J1.C3 pad.A3 pad.B3 pad.C3 U4.7 | length 500
  Top Layer w20: pad.A3 pad.B3 pad.C3 U4.7
RIGHT_1-: J1.A2 J1.B2 J1.C2 pad.A2 pad.B2 pad.C2 U4.9 | length 500
  Top Layer w20: pad.A2 pad.B2 pad.C2 U4.9
RIGHT_2+: J1.A13 J1.B13 J1.C13 pad.A13 pad.B13 pad.C13 U5.7 | length 520.7
  Top Layer w20: pad.A13 pad.B13 pad.C13 1700,2450 U5.7
RIGHT_2-: J1.A12 J1.B12 J1.C12 pad.A12 pad.B12 pad.C12 U5.9 | length 520.7
  Top Layer w20: pad.A12 pad.B12 pad.C12 1700,2350 U5.9
RX_MD: J1.C24 pad.C24 R67.2 | length 3989.4
  Top Layer w10: v1(2250,1150) R67.2
  Bottom Layer w10: pad.C24 1400,3500 1200,3500 1183.84,3483.84 1183.84,1191.16 1205,1170 1258.28,1170 1345,1083.28 1345,983.28 1383.28,945 2045,945 v1(2250,1150)
SCL: P3.2 R69.2 U2.32 U7.10 U8.22 | length 5646.1
  Top Layer w10: v1(3200,1800) v1(3550,1800) ; v1(3550,2325) v1(4365,2325) ; R69.2 v1(3816.34,4131.5)
  Bottom Layer w10: U2.32 3150,1975 3200,1925 v1(3200,1800) ; U7.10 3450,1375 3500,1375 3550,1425 v1(3550,1800) v1(3550,2325) ; P3.2 v1(3816.34,4131.5) ; U8.22 3841.34,4181.5 3816.34,4156.5 v1(3816.34,4131.5) ; v1@4366.34,2325 4366.34,3057.88 4491.34,3182.88 4491.34,3253.66 4325,3420 4325,3558.46 4232.12,3651.34 3843.66,3651.34 3816.34,3678.66 v1(3816.34,4131.5)
SDA: P3.1 R68.2 U2.1 U7.7 U8.23 | length 5666.7
  Top Layer w10: v1(3150,1750) v1(3600,1750) 3600,1150 3550,1100 U7.7 ; v1(3600,2275) v1(4325,2275) ; R68.2 v1(3816.34,4231.5) 3850,4197.83 3850,4100 3825,4075 v1(3775,4075)
  Bottom Layer w10: v1(3150,1750) U2.1 ; P3.1 v1(3816.34,4231.5) U8.23 ; v1(3600,1750) v1(3600,2275) ; v1(3775,4075) 3775,3661.54 3826.54,3610 4215,3610 4283.66,3541.34 4283.66,3402.88 4450,3236.54 4450,3200 4325,3075 v1(4325,2275)
STATUS_0: R47.1 U7.6 | length 2837.6
  Top Layer w10: U7.6 3650,1150 3700,1200 3700,2025 3725,2050 v1(4425,2050) ; v1(4425,3000) R47.1
  Bottom Layer w10: v1(4425,2050) v1(4425,3000)
STATUS_1: R48.1 U7.9 | length 3034.9
  Top Layer w10: U7.9 v1(3350,1110) ; v1(3800,1325) 3725,1400 3725,1975 3750,2000 v1(4475,2000) ; v1(4475,2625) 4450,2650 4450,2725 4475,2750 R48.1
  Bottom Layer w10: v1(3350,1110) 3785,1110 3800,1125 v1(3800,1325) ; v1(4475,2000) v1(4475,2625)
TTL_RX: P1.2 R67.1 R72.2 U7.8 | length 1826.3
  Top Layer w10: P1.2 2700,1175 2725,1200 2725,1325 2775,1375 3450,1375 3500,1325 3500,1250 3450,1200 U7.8
  Top Layer w25: R67.1 2475,1150 2500,1175 ; R72.2 2475,1275 2500,1250 2500,1175 ; P1.2 2500,1175
TTL_TX: P1.3 Q2.1 U7.11 | length 1367.2
  Top Layer w10: P1.3 2725,1075 2750,1100 2750,1300 2800,1350 3375,1350 U7.11
  Top Layer w25: Q2.1 2512.6,987.6 2525,1000 2525,1050 2550,1075 P1.3
TX_MD: J1.A24 pad.A24 Q2.3 | length 3829.3
  Top Layer w10: v1(2250,1025) Q2.3
  Bottom Layer w10: pad.A24 1175,3550 1163.84,3538.84 1163.84,1182.88 1196.72,1150 1250,1150 1325,1075 1325,975 1375,925 2150,925 v1(2250,1025)
VOL_0: R39.1 U8.4 | length 674.7
  Top Layer w15: v1(4366.34,4581.5) R39.1
  Bottom Layer w15: U8.4 4341.34,4131.5 4366.34,4156.5 v1(4366.34,4581.5)
VOL_1: R40.1 U8.5 | length 535.1
  Top Layer w15: v1(4416.34,4406.5) R40.1
  Bottom Layer w15: U8.5 4366.34,4081.5 4391.34,4106.5 4391.34,4381.5 v1(4416.34,4406.5)
VOL_2: R41.1 U8.6 | length 395.4
  Top Layer w15: v1(4441.34,4231.5) R41.1
  Bottom Layer w15: U8.6 4366.34,4031.5 4416.34,4081.5 4416.34,4206.5 v1(4441.34,4231.5)
VOL_3: R42.1 U8.7 | length 270.4
  Top Layer w15: v1(4441.34,4056.5) R42.1
  Bottom Layer w15: U8.7 4366.34,3981.5 v1(4441.34,4056.5)
VOL_4: R43.1 U8.8 | length 260.1
  Top Layer w15: v1(4441.34,3881.5) R43.1
  Bottom Layer w15: U8.8 4391.34,3931.5 v1(4441.34,3881.5)
VOL_5: R44.1 U8.9 | length 385.1
  Top Layer w15: v1(4441.34,3706.5) R44.1
  Bottom Layer w15: U8.9 4391.34,3881.5 4441.34,3831.5 v1(4441.34,3706.5)
VOL_6: R45.1 U8.10 | length 495.4
  Top Layer w15: v1(4441.34,3531.5) R45.1
  Bottom Layer w15: U8.10 4366.34,3831.5 4391.34,3806.5 4391.34,3581.5 v1(4441.34,3531.5)
VOL_7: R46.1 U8.11 | length 604.5
  Top Layer w15: v1(4443.5,3356.5) R46.1
  Bottom Layer w15: U8.11 4341.34,3781.5 4366.34,3756.5 4366.34,3550 4443.5,3472.83 v1(4443.5,3356.5)
pads on no net: ICSP1.6 ICSP1.A ICSP1.B ICSP1.C U2.14 U4.12 U5.12 U8.1 U8.13 U8.14 U8.15 U8.16 U8.17 U8.18 U8.19 U8.20

## Polygon pours and split planes (outlines as drawn)
GND on Bottom Layer "GND" (solid, remove dead copper, pour order 4): 1040,4770 4980,4770 4980,830 1040,830 1040,4770
GND on Top Layer "GND" (solid, remove dead copper, pour order 3): 1040,4770 4980,4770 4980,830 1040,830 1040,4770

## Keep-outs
Keep-Out Layer:
  lines w15: 1141.34,2618.5 1141.34,4668.5 3191.34,4668.5 ; 1141.34,2981.5 1141.34,881.5 3191.34,881.5 ; 2828.35,881.5 4928.35,881.5 4928.35,2981.5 ; 2828.35,4668.5 4928.35,4668.5 4928.35,2618.5

## Silkscreen, mask and mechanical layers (free items; w line width, h text height)
Top Overlay:
  lines w7.87: 1189.37,949.61 1269.68,949.61 1269.68,1143.7 ; 1189.37,4650.39 1269.68,4650.39 1269.68,4398.23
  text "32" at 1556.3,4300.79 h59.06 r90
  text "Order No. 52759" at 4185,1355 h40
  text "1" at 1556.3,1240.16 h59.06 r90
  text "a" at 1269.68,1162.99 h59.06 r90
  text "b" at 1369.68,1162.99 h59.06 r90
  text "c" at 1469.68,1162.99 h59.06 r90
Mechanical 1:
  lines w3.94: 1041.34,949.61 1041.34,4650.39
  lines w15: 1041.34,831.5 1041.34,4768.5 4978.35,4768.5 4978.35,831.5 1041.34,831.5

## Text inside footprints (layer, text, board x,y; h text height)
C9: Bottom Overlay "+" at 2274.53,2019.13 h40 r90
C12: Bottom Overlay "+" at 2215.47,1960.87 h40 r270
C24: Bottom Overlay "+" at 2193.31,3611.02 h40 r180
C29: Bottom Overlay "+" at 2193.31,4236.02 h40 r180
C32: Bottom Overlay "+" at 3270.47,1945.87 h40 r270
C34: Bottom Overlay "+" at 1787.2,3836.02 h40 r180
C35: Bottom Overlay "+" at 2145.47,4226.97 h40
C36: Bottom Overlay "+" at 1787.2,3611.02 h40 r180
J1: Top Overlay "21" at 1556.3,3200.79 h59.06 r90; Top Overlay "11" at 1556.3,2215.55 h59.06 r90; Top Overlay "32" at 1556.3,4300.79 h59.06 r90; Top Overlay "c" at 1469.68,1162.99 h59.06 r90; Top Overlay "b" at 1369.68,1162.99 h59.06 r90; Top Overlay "a" at 1269.68,1162.99 h59.06 r90; Top Overlay "1" at 1556.3,1240.16 h59.06 r90; Mechanical 1 "PCB Edge" at 1021.65,970.47 h23.62 r90
U6: Bottom Overlay "1" at 3776.18,4311.81 h40; Bottom Overlay "2" at 3586.02,4311.81 h40; Bottom Overlay "3" at 3686.02,4311.81 h40